# EAGLE board version1 (EAGLE 8.0.1)

Size 35 x 35 mm. Coordinates in mm from the lower left corner, seen from the top.
Outline: 0,0 35,0 35,35 0,35 0,0
Copper layers (1*16): Top 0.035mm / dielectric 1.5mm / Bottom 0.035mm
Design rules "default": minimum track width 10mil, minimum drill 24mil, track to track 8mil, track to pad 8mil, pad to pad 8mil, via to via 8mil, smd to smd 8mil, copper to edge 40mil, drill to drill 8mil, minimum pad ring 10mil, minimum via ring 8mil, stop-mask expansion 4mil, vias tented up to drill 0mil, thermal gap 10mil

## Footprints (pad centres in the part's own frame; a part is rotated, then mirrored left to right if it is on the bottom)
1X05 = drill 1.016 long: 1 -5.08,0; 2 -2.54,0; 3 0,0; 4 2.54,0; 5 5.08,0
C1206 = smd 1.6 x 1.8: 1 -1.4,0; 2 1.4,0
C0805 = smd 1.3 x 1.5: 1 -0.85,0; 2 0.85,0
SMD1,27-2,54 = smd 1.27 x 2.54: 1 0,0
1X02 = drill 1.016 long: 1 -1.27,0; 2 1.27,0
1X04 = drill 1.016 long: 1 -3.81,0; 2 -1.27,0; 3 1.27,0; 4 3.81,0
TC26V = drill 0.813: 1 -1.27,0; 2 1.27,0
R1206 = smd 1.6 x 1.803: 1 -1.422,0; 2 1.422,0
TQFP32-08 = smd 1.27 x 0.559: 1 -4.293,2.8; 2 -4.293,2; 3 -4.293,1.2; 4 -4.293,0.4; 5 -4.293,-0.4; 6 -4.293,-1.2; 7 -4.293,-2; 8 -4.293,-2.8; 17 4.293,-2.8; 18 4.293,-2; 19 4.293,-1.2; 20 4.293,-0.4; 21 4.293,0.4; 22 4.293,1.2; 23 4.293,2; 24 4.293,2.8 | smd 0.559 x 1.27: 9 -2.8,-4.293; 10 -2,-4.293; 11 -1.2,-4.293; 12 -0.4,-4.293; 13 0.4,-4.293; 14 1.2,-4.293; 15 2,-4.293; 16 2.8,-4.293; 25 2.8,4.293; 26 2,4.293; 27 1.2,4.293; 28 0.4,4.293; 29 -0.4,4.293; 30 -1.2,4.293; 31 -2,4.293; 32 -2.8,4.293

## Placement (x,y rotation side)
BTN  [1X05]  33.25,17.14 90 top
C1  22pF  [C1206]  8.26,12.06 0 top
C2  22pF  [C1206]  8.26,7.62 0 top
C3  0.1uF  [C0805]  3.17,20.95 0 top
C5  0.1uF  [C0805]  26.67,25.4 0 top
MISO  [SMD1,27-2,54]  33.02,2.54 0 top
MOSI  [SMD1,27-2,54]  31.11,2.54 0 top
MOT  [1X02]  3.81,3.17 0 top
OLED  [1X04]  17.61,25.4 0 top
PWR  [1X02]  3.17,16.51 0 top
Q1  16MHz  [TC26V]  3.17,10.16 0 top
R1  10K  [R1206]  17.78,1.91 0 top
R2  100k  [R1206]  28.57,12.06 0 top
R3  100k  [R1206]  28.57,14.61 0 top
R4  100k  [R1206]  28.57,17.14 0 top
R5  100k  [R1206]  28.57,19.68 0 top
R6  100  [R1206]  11.43,1.91 180 top
RST  [SMD1,27-2,54]  29.21,2.54 0 top
RTC  [1X04]  22.23,30.48 0 top
RX  [SMD1,27-2,54]  27.3,2.54 0 top
SCK  [SMD1,27-2,54]  25.4,2.54 0 top
SIM  [1X05]  7.62,30.48 0 top
TX  [SMD1,27-2,54]  23.5,2.54 0 top
U1  ATMEGA328  [TQFP32-08]  17.22,12.62 0 top

## Library data of the parts
BTN MOT OLED PWR RTC SIM = pinhead
C1-C3 C5 R1-R6 = adafruit
MISO MOSI RST RX SCK TX = wirepad
Q1 = adafruit; OC_FARNELL: unknown; OC_NEWARK: unknown
U1 = thecustomgeek

## Nets
A0: U1.23
A1: U1.24
A2: U1.25
A3: U1.26
A4: OLED.4 RTC.4 U1.27
A5: OLED.3 RTC.3 U1.28
A6: U1.19
A7: U1.22
AREF: C5.1 U1.20
D0: RX.1 U1.30
D1: TX.1 U1.31
D2: SIM.2 U1.32
D3: R6.1 U1.1
D4: U1.2
D5: U1.9
D6: BTN.4 R5.1 U1.10
D7: BTN.3 R4.1 U1.11
D8: BTN.2 R3.1 U1.12
D9: BTN.1 R2.1 U1.13
D10: SIM.4 U1.14
D11: MOSI.1 SIM.3 U1.15
D12: MISO.1 U1.16
D13: SCK.1 U1.17
GND: BTN.5 C1.2 C2.2 C3.2 C5.2 MOT.2 OLED.2 PWR.2 RTC.2 SIM.5 U1.3 U1.5 U1.21
N$1: MOT.1 R6.2
N$43: C2.1 Q1.2 U1.7
N$44: C1.1 Q1.1 U1.8
RST: R1.1 RST.1 U1.29
VCC: C3.1 OLED.1 PWR.1 R1.2 R2.2 R3.2 R4.2 R5.2 RTC.1 SIM.1 U1.4 U1.6 U1.18

## Tracks (layer width: path | path; a pad name or v marks a point on that pad's centre or on a via)
A4  (2 unrouted)
A5  (2 unrouted)
AREF  (1 unrouted)
D0  (1 unrouted)
D1  (1 unrouted)
D2  (1 unrouted)
D3  (1 unrouted)
D6  (2 unrouted)
D7  (2 unrouted)
D8  (2 unrouted)
D9  (2 unrouted)
D10  (1 unrouted)
D11  (2 unrouted)
D12  (1 unrouted)
D13  (1 unrouted)
GND  (12 unrouted)
N$1  (1 unrouted)
N$43  (2 unrouted)
N$44  (2 unrouted)
RST  (2 unrouted)
VCC  (12 unrouted)